# EAGLE board wifilights-probe-board (EAGLE 7.2.0)
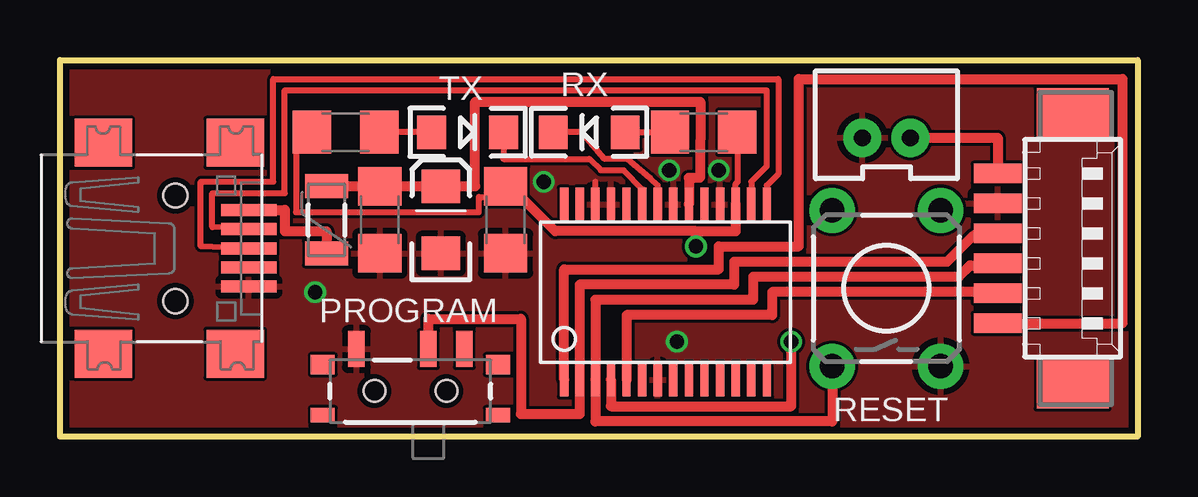
[diagram p0: board, top side]
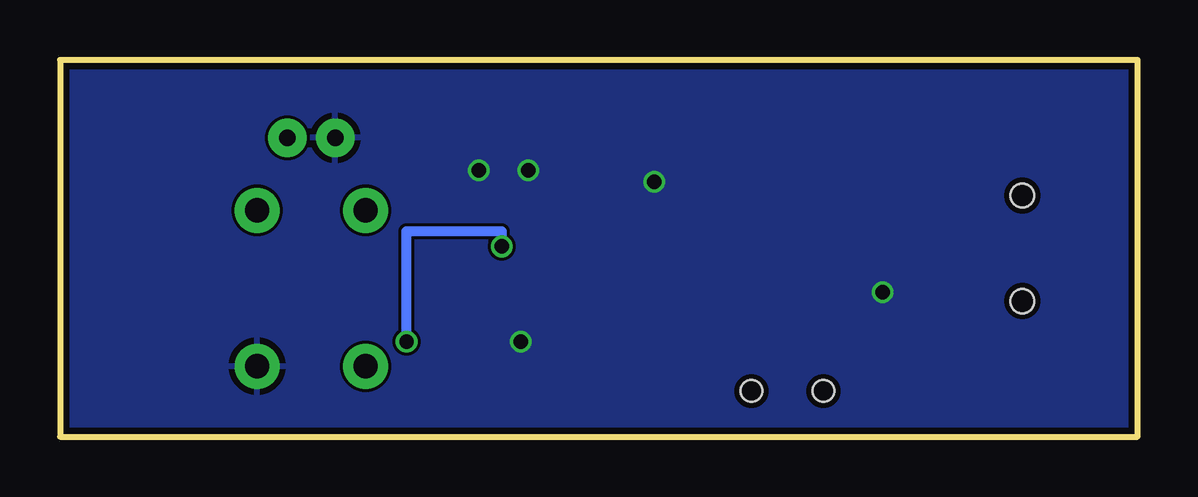
[diagram p1: board, bottom side, seen from below]

Size 44.93 x 15.72 mm. Coordinates in mm from the lower left corner, seen from the top.
Outline: 0,0 0,15.72 44.93,15.72 44.93,0 0,0
Copper layers (1*16): Top 0.035mm / dielectric 1.5mm / Bottom 0.035mm
Design rules "dirtypcbs": minimum track width 5mil, minimum drill 12mil, track to track 5mil, track to pad 5mil, pad to pad 5mil, via to via 5mil, smd to smd 0mil, copper to edge 10mil, drill to drill 10mil, minimum pad ring 10mil, minimum via ring 6mil, stop-mask expansion 2mil, vias tented up to drill 25mil, thermal gap 10mil
Net classes: 1 power: width 0.254 mm

## Footprints (pad centres in the part's own frame; a part is rotated, then mirrored left to right if it is on the bottom)
1206 = smd 1.6 x 1.8: 1 -1.4,0; 2 1.4,0
EIA3216 = smd 1.4 x 1.6: A 1.4,0; C -1.4,0
USB-MINIB = smd 0.5 x 2.308: D+ 0,4.064; D- -0.8,4.064; GND 1.6,4.064; ID 0.8,4.064; VBUS -1.6,4.064 | smd 2 x 2.4: GND1 -4.4,-2; GND2 -4.4,3.5; GND3 4.4,3.5; GND4 4.4,-2 | hole 1: -2.2,1; 2.2,1
PTC-1206 = smd 1 x 1.8: 1 -1.4,0; 2 1.4,0
JST-2-PTH-VERT = drill 0.7 pad 1.6: 1 -1,-0.55; 2 1,-0.55
SWITCH-SPST-SMD-A = smd 0.7 x 1.5: 1 -2.25,-1.75; 2 -0.75,-1.75; 3 2.25,-1.75 | smd 1 x 0.6: GND1 -3.65,1; GND3 3.65,1 | smd 1 x 0.8: GND2 -3.65,-1.1; GND4 3.65,-1.1 | hole 0.9: -1.5,0; 1.5,0
TACTILE-PTH = drill 1.016 pad 1.88: 1 -3.251,2.261; 2 3.251,2.261; 3 -3.251,-2.261; 4 3.251,-2.261
LED-1206 = smd 1.2 x 1.4: A -1.5,0; C 1.5,0
SSOP28DB = smd 0.348 x 1.397: 1 -4.225,-3.656; 2 -3.575,-3.656; 3 -2.925,-3.656; 4 -2.275,-3.656; 5 -1.625,-3.656; 6 -0.975,-3.656; 7 -0.325,-3.656; 8 0.325,-3.656; 9 0.975,-3.656; 10 1.625,-3.656; 11 2.275,-3.656; 12 2.925,-3.656; 13 3.575,-3.656; 14 4.225,-3.656; 15 4.225,3.656; 16 3.575,3.656; 17 2.925,3.656; 18 2.275,3.656; 19 1.625,3.656; 20 0.975,3.656; 21 0.325,3.656; 22 -0.325,3.656; 23 -0.975,3.656; 24 -1.625,3.656; 25 -2.275,3.656; 26 -2.925,3.656; 27 -3.575,3.656; 28 -4.225,3.656
53261-06 = smd 0.8 x 2: 1 3.125,-2.5; 2 1.875,-2.5; 3 0.625,-2.5; 4 -0.625,-2.5; 5 -1.875,-2.5; 6 -3.125,-2.5 | smd 2.1 x 3: S1 5.625,0.625; S2 -5.625,0.625

## Placement (x,y rotation side)
C1  0.1uF  [1206]  18.57,9.05 270 top
C2  0.1uF  [1206]  13.34,9.05 270 top
C5  10uF  [EIA3216]  15.88,9.05 90 top
CN1  [USB-MINIB]  3.81,7.86 270 top
F1  500mA  [PTC-1206]  11.11,9.05 90 top
JP1  12V DC  [JST-2-PTH-VERT]  34.45,13.02 0 top
PROGRAM  [SWITCH-SPST-SMD-A]  14.61,1.91 180 top
R1  330  [1206]  11.91,12.7 180 top
R2  330  [1206]  26.83,12.7 0 top
RESET  SWITCH-MOMENTARY-2PTH  [TACTILE-PTH]  34.45,6.19 90 top
RX  GREEN  [LED-1206]  22.07,12.7 180 top
TX  RED  [LED-1206]  16.99,12.7 0 top
U1  FT232R  [SSOP28DB]  25.24,6.03 0 top
X1  53261-06  [53261-06]  41.59,7.86 270 top

## Library data of the parts
C1 C2 R1 R2 = SparkFun-Passives
C5 = SparkFun-Capacitors; PROD_ID: CAP-00811
CN1 = adafruit
F1 U1 = SparkFun
JP1 = SparkFun-Connectors
PROGRAM RESET = SparkFun-Electromechanical
RX TX = SparkFun-LED
X1 = con-molex; OC_FARNELL: 1125375; OC_NEWARK: unknown

## Nets
3.3V: C1.1 R1.2 R2.2 U1.4 U1.17
12V: JP1.2 X1.6
CTS: U1.11
DCD: U1.10
DSR: U1.9
DTR: PROGRAM.2 U1.2 X1.4
GND: C1.2 C2.2 C5.C CN1.GND JP1.1 PROGRAM.3 RESET.3 U1.7 U1.18 U1.21 U1.25 U1.26 X1.5
N$1: R1.1 TX.A
N$2: R2.1 RX.A
N$3: CN1.VBUS F1.1
PWREN: U1.14
RI: U1.6
RTS: RESET.1 U1.3 X1.3
RXD: U1.5 X1.2
RXLED: RX.C U1.22
SLEEP: U1.12
TXD: U1.1 X1.1
TXDEN: U1.13
TXLED: TX.C U1.23
USB_D+: CN1.D+ U1.15
USB_D-: CN1.D- U1.16
VCC [power]: C2.1 C5.A F1.2 U1.20

## Tracks (layer width: path | path; a pad name or v marks a point on that pad's centre or on a via)
3.3V  (via drill 0.6)
  Top 0.254: U1.17 28.17,10.54 28.26,10.64 28.26,12.54 28.1,12.7 R2.2 | R1.2 9.84,12.7 9.84,9.37 17.46,9.37 17.46,10 18.57,10 C1.1
  Top 0.406: 18.57,11.02 C1.1 18.76,10.45 20.64,8.57 26.51,8.57 | 26.51,8.57 28.17,8.57 U1.17 | U1.4 22.97,1.27 30.48,1.27 v30.48,3.97 | v26.51,7.94 26.51,8.57
  Bottom 0.406: v30.48,3.97 30.48,8.57 26.51,8.57 v26.51,7.94
12V
  Top 0.406: JP1.2 39.09,12.47 X1.6
DTR
  Top 0.406: PROGRAM.2 15.36,4.92 19.21,4.92 19.21,0.95 21.67,0.95 U1.2 21.67,6.35 28.1,6.35 28.1,7.29 36.98,7.29 38.1,8.41 39.02,8.41 X1.4
GND  (via drill 0.6)
  Top 0.254: U1.26 22.32,10.64
  other vias: 20.16,10.64 27.46,11.11 25.4,11.11 10.64,6.03 25.72,3.97
  pour Bottom: 44.93,0 0,0 0,15.72 44.93,15.72
  pour Top: 44.93,0 0,0 0,15.72 44.93,15.72
N$1
  Top 0.254: TX.A R1.1
N$2
  Top 0.254: RX.A R2.1
N$3
  Top 0.406: CN1.VBUS 9.37,9.46 9.37,8.57 11.11,8.57 F1.1
RTS
  Top 0.406: RESET.1 32.19,0.64 22.32,0.64 U1.3 22.32,5.71 28.89,5.71 28.89,6.68 37.48,6.68 37.94,7.14 39,7.14 X1.3
RXD
  Top 0.406: U1.5 23.62,5.08 29.69,5.08 29.69,6.03 39.04,6.03 X1.2
RXLED
  Top 0.254: U1.22 24.92,10.48 24.6,10.79 23.65,11.59 22.7,11.59 21.75,12.7 RX.C
TXD
  Top 0.406: U1.1 21.02,6.99 27.46,6.99 27.46,7.94 30.8,7.94 30.8,14.92 44.29,14.92 44.29,4.73 X1.1
TXLED
  Top 0.254: TX.C 18.49,11.59 22.07,11.59 22.54,11.11 23.5,11.11 24.29,10.32 24.29,9.69 U1.23
USB_D+
  Top 0.254: CN1.D+ 5.87,7.94 5.87,10.64 8.89,10.64 8.89,14.92 29.94,14.92 29.94,10.95 29.47,10.48 U1.15
USB_D-
  Top 0.254: CN1.D- 6.35,8.74 6.35,10.16 9.37,10.16 9.37,14.45 29.45,14.45 29.45,11.27 28.82,10.64 U1.16
VCC
  Top 0.406: F1.2 C2.1 C5.A 17.3,10.45 17.3,13.97 26.69,13.97 26.67,10.79 26.22,10.79 U1.20